# EAGLE board pervaneli aracın karaya yanaşma senaryosu (EAGLE 9.7.0)

Size 237.39 x 206.48 mm. Coordinates in mm from the lower left corner, seen from the top.
Outline: 0,0 237.39,0 237.39,206.48 0,206.48 0,0
Copper layers (1*16): Top 0.035mm / dielectric 1.5mm / Bottom 0.035mm
Design rules "default": minimum track width 6mil, minimum drill 0.35mm, track to track 6mil, track to pad 6mil, pad to pad 6mil, via to via 6mil, smd to smd 6mil, copper to edge 40mil, drill to drill 6mil, minimum pad ring 10mil, minimum via ring 8mil, stop-mask expansion 4mil, vias tented up to drill 0mil, thermal gap 10mil

## Footprints (pad centres in the part's own frame; a part is rotated, then mirrored left to right if it is on the bottom)
CAPPRD254W65D500H1150B = drill 0.85 pad 1.45: 1 -1.27,0; 2 1.27,0
LEDRD254W60D565H860B = drill 0.981 pad 1.581: 1 -1.27,0; 2 1.27,0
LEDRD254W60D565H860B_O = drill 0.981 pad 1.581: 1 -1.27,0; 2 1.27,0
LEDRD254W60D565H860B_G = drill 0.981 pad 1.581: 1 -1.27,0; 2 1.27,0
LEDRD254W60D565H860B_Y = drill 0.981 pad 1.581: 1 -1.27,0; 2 1.27,0
PIEZO = drill 1 pad 1.6: 1 -3.5,0; 2 3.5,0
28015 = drill 1.016 long: 1 -2.54,0; 2 0,0; 3 2.54,0
GL5528 = drill 0.8 pad 1.4: 1 -1.702,0; 2 1.702,0
RESAD1016W63L850D250B = drill 0.83 pad 1.43: 1 -5.08,0; 2 5.08,0
HA-06-SM065 = drill 1 pad 1.676: 1 -2.54,-2.54; 2 0,2.54; 3 2.54,-2.54
SM-S2309S = drill 1.016 long: 1 -2.54,0; 2 0,0; 3 2.54,0
ARDUINO-UNO-R3-SHIELD = drill 1.016 pad 1.88: 3.3V 24.13,-2.54; 5V 24.13,0; A0 24.13,12.7; A1 24.13,15.24; A2 24.13,17.78; A3 24.13,20.32; A4 24.13,22.86; A5 24.13,25.4; AREF -24.13,-13.97; D2 -24.13,20.32; D3 -24.13,17.78; D4 -24.13,15.24; D5 -24.13,12.7; D6 -24.13,10.16; D7 -24.13,7.62; D8 -24.13,3.81; D9 -24.13,1.27; D10 -24.13,-1.27; D11 -24.13,-3.81; D12 -24.13,-6.35; D13 -24.13,-8.89; GND@0 24.13,2.54; GND@1 24.13,5.08; GND@2 -24.13,-11.43; IOREF 24.13,-7.62; NC 24.13,-10.16; RES 24.13,-5.08; RX -24.13,25.4; SCL -24.13,-19.05; SDA -24.13,-16.51; TX -24.13,22.86; VIN 24.13,7.62
LCD-I2C = drill 1.016 long: 1 -19.05,-5.08; 2 -19.05,-7.62; 3 -19.05,-10.16; 4 -19.05,-12.7
TO92 = drill 0.813 octagon: 1 -1.27,0; 2 0,1.905; 3 1.27,0

## Placement (x,y rotation side)
C1  1u  [CAPPRD254W65D500H1150B]  97.48,56.71 90 top
D1  RED  [LEDRD254W60D565H860B]  115.26,159.58 90 top
D2  ORANGE  [LEDRD254W60D565H860B_O]  115.26,151.96 90 top
D3  GREEN  [LEDRD254W60D565H860B_G]  115.26,144.34 90 top
D4  YELLOW  [LEDRD254W60D565H860B_Y]  110.18,68.14 90 top
PIEZO1  PIEZO  [PIEZO]  100.02,124.02 270 top
PING1  DISTANCE-SENSOR-3PIN  [28015]  80.99,196.32 0 top
R1  PHOTOCELL_GL5528  [GL5528]  112.72,75.76 270 top
R2  220  [RESAD1016W63L850D250B]  102.56,160.85 0 top
R3  220  [RESAD1016W63L850D250B]  102.56,153.23 0 top
R4  220  [RESAD1016W63L850D250B]  102.56,145.61 0 top
R5  1k  [RESAD1016W63L850D250B]  102.56,69.41 0 top
R6  220  [RESAD1016W63L850D250B]  108.32,79.57 330 top
RPOT1  250k  [HA-06-SM065]  115.26,99.89 90 top
SERVO1  SERVOSM-S2309S  [SM-S2309S]  152.18,56.93 90 top
U1  ARDUINO-UNO-R3-SHIELD  [ARDUINO-UNO-R3-SHIELD]  168.83,143.61 180 top
U2  ARDUINO-UNO-R3-SHIELD  [ARDUINO-UNO-R3-SHIELD]  29.84,131.83 180 top
U3  LCD-16X2-I2CSUNFOUNDER-IIC  [LCD-I2C]  180.5,106.87 0 top
U4  TMP36GT9Z_TO92  [TO92]  110.18,110.05 90 top
U5  TMP36GT9Z_TO92  [TO92]  112.72,89.73 90 top
U6  LCD-16X2-I2CSUNFOUNDER-IIC  [LCD-I2C]  181.76,36.63 0 top

## Library data of the parts
C1 PIEZO1 PING1 R1-R6 RPOT1 SERVO1 U1-U6 = Tinkercad
D1 = Tinkercad; CATEGORY: Opto-Electronic; SUB-CATEGORY: LED; VALUE: LED_RED
D2 = Tinkercad; CATEGORY: Opto-Electronic; SUB-CATEGORY: LED; VALUE: LED_ORANGE
D3 = Tinkercad; CATEGORY: Opto-Electronic; SUB-CATEGORY: LED; VALUE: LED_GREEN
D4 = Tinkercad; CATEGORY: Opto-Electronic; SUB-CATEGORY: LED; VALUE: LED_YELLOW

## Nets
D1_C: D1.2 R2.2
D2_C: D2.2 R3.2
D3_C: D3.2 R4.2
D4_C: D4.2 R5.2
U1_5V: PING1.2 R1.2 RPOT1.1 SERVO1.1 U1.5V U2.5V U3.2 U4.3 U5.3 U6.2
U1_A0: U1.A0 U4.2
U1_A1: RPOT1.2 U1.A1
U1_A2: U1.A2 U5.2
U1_GND: PIEZO1.2 PING1.1 R2.1 R3.1 R4.1 R5.1 R6.1 RPOT1.3 SERVO1.3 U1.GND@0 U1.GND@1 U1.GND@2 U2.GND@0 U2.GND@1 U2.GND@2 U3.1 U4.1 U5.1 U6.1
U1_SCL: U1.SCL U3.4
U1_SDA: U1.SDA U3.3
U2_A3: R1.1 R6.2 U2.A3
U2_D5: SERVO1.2 U2.D5
U2_D6: D4.1 U2.D6
U2_D9: PIEZO1.1 U2.D9
U2_D10: D3.1 U2.D10
U2_D11: D2.1 U2.D11
U2_D12: D1.1 U2.D12
U2_D13: PING1.3 U2.D13
U2_SCL: U2.SCL U6.4
U2_SDA: U2.SDA U6.3

## Tracks (layer width: path | path; a pad name or v marks a point on that pad's centre or on a via)
D1_C  (1 unrouted)
D2_C  (1 unrouted)
D3_C  (1 unrouted)
D4_C  (1 unrouted)
U1_5V  (9 unrouted)
U1_A0  (1 unrouted)
U1_A1  (1 unrouted)
U1_A2  (1 unrouted)
U1_GND  (18 unrouted)
U1_SCL  (1 unrouted)
U1_SDA  (1 unrouted)
U2_A3  (2 unrouted)
U2_D5  (1 unrouted)
U2_D6  (1 unrouted)
U2_D9  (1 unrouted)
U2_D10  (1 unrouted)
U2_D11  (1 unrouted)
U2_D12  (1 unrouted)
U2_D13  (1 unrouted)
U2_SCL  (1 unrouted)
U2_SDA  (1 unrouted)